# Altium PCB PnP.PcbDoc (part 5 of 5)
Units mm, origin at the board's own origin, x right, y up, seen from the top; angles counter-clockwise.
Board outline 95 x 65 mm, 6 copper layers (Top Layer, L2 - GND, L3 - PWR, L4 - Sig, L5 - GND, Bottom Layer), stack 1.538 mm thick; 358 components, 260 nets, 1269 pads, 686 vias.
Unrouted connection lines stored in the file: 161.
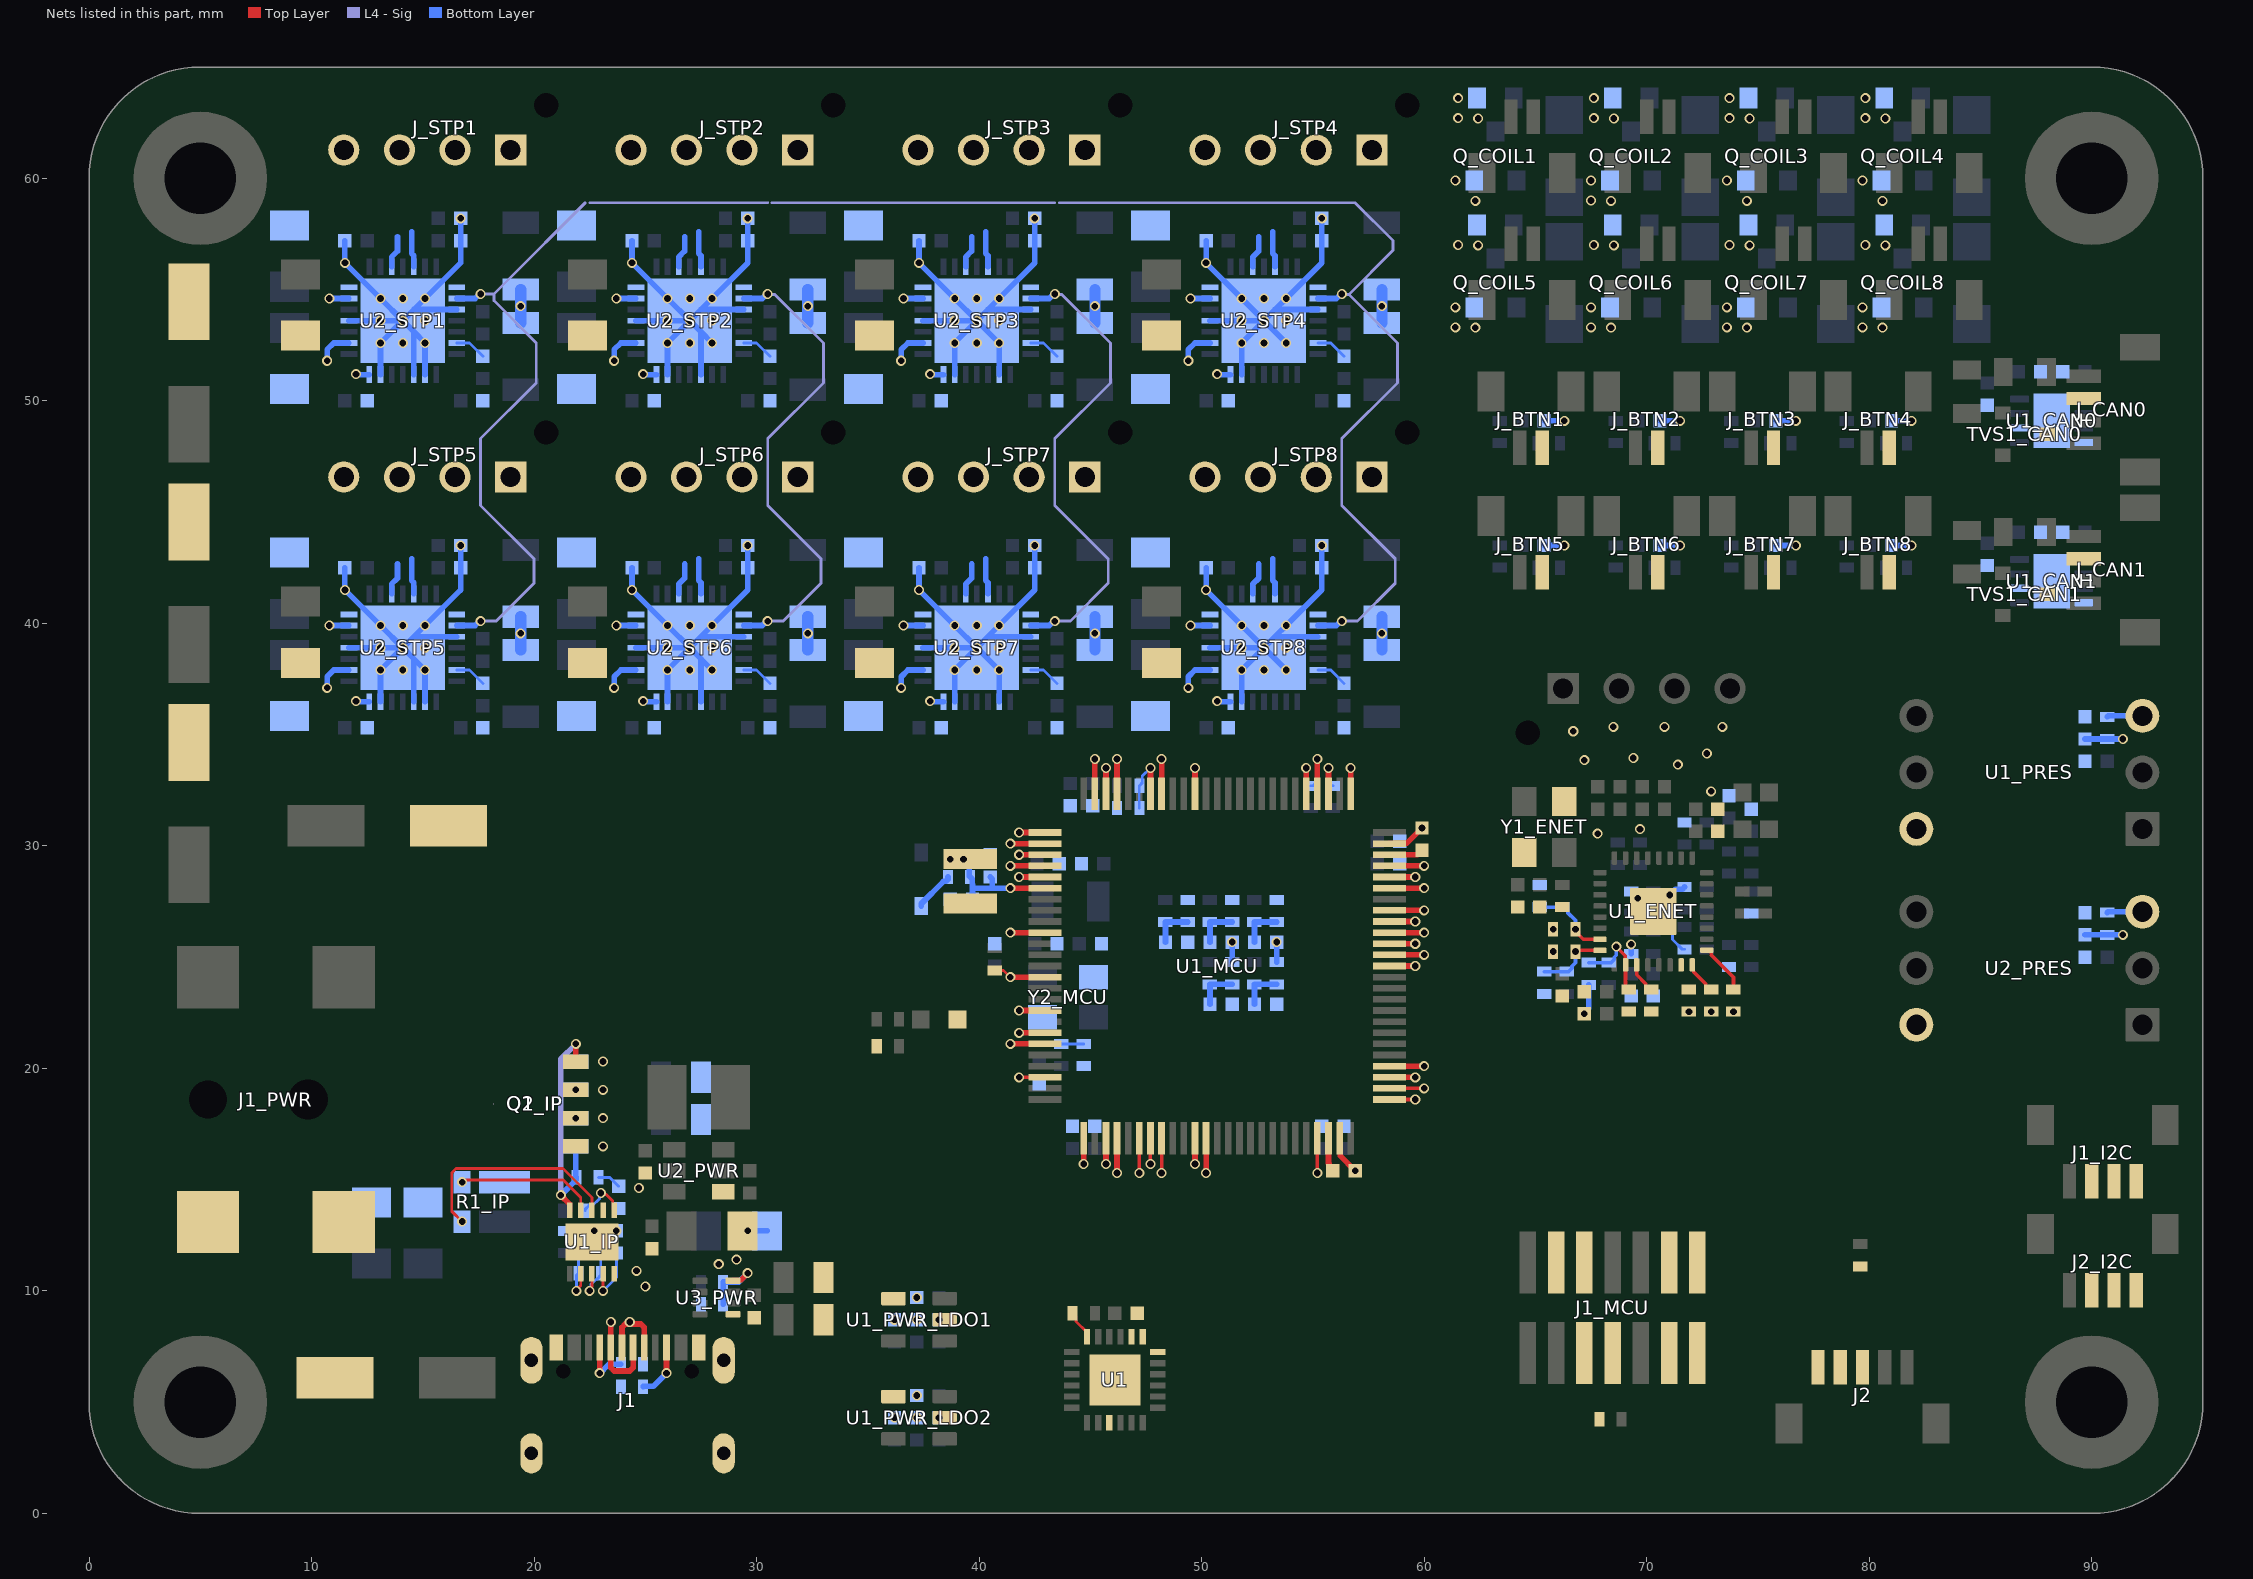
[diagram p8: the nets of this part, all layers, seen from the top]

## Via types
v1: diameter 0.45, hole 0.3, Top Layer to Bottom Layer, tented both sides, 674 vias
v2: diameter 0.55, hole 0.4, Top Layer to Bottom Layer, tented both sides, 12 vias

## Nets (pads, with @x,y where several pads share a name; then routed paths per layer and width w, separated by ;. In a path a pad name is that pad's centre, name@x,y a point inside that pad or via, vN(x,y) a via of type N, cw(c..) or ccw(c..) an arc to the next point about the centre after c; other vN are vias at no path point) (continued)
GND: B1_MCU.2 C1.1 C1_BTN1.1 C1_BTN2.1 C1_BTN3.1 C1_BTN4.1 C1_BTN5.1 C1_BTN6.1 C1_BTN7.1 C1_BTN8.1 C1_CAN0.2 C1_CAN1.2 C1_IP.2 C1_MCU.1 C1_PRES.1 C1_PWR_LDO1.1 C1_PWR_LDO2.1 C1_STP1.1 C1_STP2.1 C1_STP3.1 C1_STP4.1 C1_STP5.1 C1_STP6.1 C1_STP7.1 C1_STP8.1 C2_CAN0.2 C2_CAN1.2 C2_IP.1 C2_MCU.1 C2_PRES.1 C2_PWR_LDO1.1 C2_PWR_LDO2.1 C2_STP1.1 C2_STP2.1 C2_STP3.1 C2_STP4.1 C2_STP5.1 C2_STP6.1 C2_STP7.1 C2_STP8.1 C3_CAN0.1 C3_CAN1.1 C3_ENET.1 C3_IP.1 C3_MCU.1 C3_PRES.1 C3_PWR_LDO1.1 C3_PWR_LDO2.1 C3_STP1.1 C3_STP2.1 C3_STP3.1 C3_STP4.1 C3_STP5.1 C3_STP6.1 C3_STP7.1 C3_STP8.1 C4_ENET.1 C4_IP.1 C4_MCU.1 C4_PRES.1 C4_PWR_LDO1.1 C4_PWR_LDO2.1 C5_ENET.1 C5_IP.1 C5_MCU.1 C5_STP1.1 C5_STP2.1 C5_STP3.1 C5_STP4.1 C5_STP5.1 C5_STP6.1 C5_STP7.1 C5_STP8.1 C6_ENET.1 C6_PWR.1 C6_STP1.1 C6_STP2.1 C6_STP3.1 C6_STP4.1 C6_STP5.1 C6_STP6.1 C6_STP7.1 C6_STP8.1 C7_MCU.1 C7_PWR.1 C8_MCU.1 C8_PWR.1 C8_STP1.1 C8_STP2.1 C8_STP3.1 C8_STP4.1 C8_STP5.1 C8_STP6.1 C8_STP7.1 C8_STP8.1 C9_ENET.1 C9_MCU.1 C9_PWR.2 C9_STP1.1 C9_STP2.1 C9_STP3.1 C9_STP4.1 C9_STP5.1 C9_STP6.1 C9_STP7.1 C9_STP8.1 C10_ENET.1 C10_MCU.1 C10_PWR.1 C10_STP1.1 C10_STP2.1 C10_STP3.1 C10_STP4.1 C10_STP5.1 C10_STP6.1 C10_STP7.1 C10_STP8.1 C11_ENET.1 C11_MCU.1 C11_PWR.1 C12_ENET.1 C12_MCU.1 C12_PWR.2 C13_ENET.1 C13_MCU.1 C13_PWR.2 C14_ENET.1 C14_MCU.1 C14_PWR.2 C15_ENET.1 C15_MCU.1 C15_PWR.2 C16_MCU.1 C16_PWR.2 C17_MCU.1 C17_PWR.2 C18_MCU.1 C18_PWR.2 C19_MCU.1 C19_PWR.2 C20_PWR.2 C21_PWR.1 C22_PWR.1 C23_PWR.1 C_COIL1.1 C_COIL2.1 C_COIL3.1 C_COIL4.1 C_COIL5.1 C_COIL6.1 C_COIL7.1 C_COIL8.1 D2_MCU.1 J1.A1 J1.B1 J1.SH1 J1.SH2 J1.SH3 J1.SH4 J1_I2C.2 J1_MCU.5 J1_MCU.7 J1_PWR.2 J1_PWR.3 J2.5 J2_I2C.2 J_BTN1.2 J_BTN2.2 J_BTN3.2 J_BTN4.2 J_BTN5.2 J_BTN6.2 J_BTN7.2 J_BTN8.2 J_CAN0.2 J_CAN1.2 Q_COIL1.2 Q_COIL2.2 Q_COIL3.2 Q_COIL4.2 Q_COIL5.2 Q_COIL6.2 Q_COIL7.2 Q_COIL8.2 R1_STP1.2 R1_STP2.2 R1_STP3.2 R1_STP4.2 R1_STP5.2 R1_STP6.2 R1_STP7.2 R1_STP8.2 R2_STP1.2 R2_STP2.2 R2_STP3.2 R2_STP4.2 R2_STP5.2 R2_STP6.2 R2_STP7.2 R2_STP8.2 R3.1 R3_PWR.1 R4.1 R4_PWR.1 R6_IP.1 R6_MCU.1 R8_MCU.1 R8_PWR.1 R9_PWR.1 R10_PWR.1 R12_ENET.1 R12_PWR.1 R27_ENET.1 R28_ENET.1 R29_ENET.1 R30_ENET.1 R31_ENET.1 R32_ENET.1 R33_ENET.1 R34_ENET.1 R35_ENET.1 R36_ENET.1 TVS1_CAN0.3 TVS1_CAN1.3 U1.9 U1.18 U1.25 U1_CAN0.2 U1_CAN0.8 U1_CAN0.9 U1_CAN1.2 U1_CAN1.8 U1_CAN1.9 U1_ENET.33 U1_IP.5 U1_IP.11 U1_MCU.10 U1_MCU.19 U1_MCU.26 U1_MCU.49 U1_MCU.74 U1_MCU.99 U1_PRES.6 U1_PWR_LDO1.2 U1_PWR_LDO1.4 U1_PWR_LDO2.2 U1_PWR_LDO2.4 U2_PRES.6 U2_PWR.4 U2_STP1.3 U2_STP1.9 U2_STP1.10 U2_STP1.13 U2_STP1.18 U2_STP1.29 U2_STP2.3 U2_STP2.10 U2_STP2.13 U2_STP2.18 U2_STP2.29 U2_STP3.3 U2_STP3.9 U2_STP3.13 U2_STP3.18 U2_STP3.29 U2_STP4.3 U2_STP4.13 U2_STP4.18 U2_STP4.29 U2_STP5.3 U2_STP5.9 U2_STP5.10 U2_STP5.13 U2_STP5.18 U2_STP5.29 U2_STP6.3 U2_STP6.10 U2_STP6.13 U2_STP6.18 U2_STP6.29 U2_STP7.3 U2_STP7.9 U2_STP7.13 U2_STP7.18 U2_STP7.29 U2_STP8.3 U2_STP8.13 U2_STP8.18 U2_STP8.29 U3_PWR.1 Y1_ENET.2 Y1_ENET.4 Y2_MCU.2 Y2_MCU.4 | length 201.2
  Top Layer w0.254: v1(41.4,26.1) U1_MCU.10@42.962,26.1 ; v1(41.8,21.6) U1_MCU.19@42.962,21.6 ; v1(44.7,15.7) U1_MCU.26@44.7,16.862 ; U1_MCU.99@45.2,32.338 v1(45.2,33.9) ; U1_MCU.49@56.2,16.862 56.223,16.839 56.223,16.077 v1(56.9,15.4) ; U1_MCU.74@58.438,30.1 58.461,30.123 59.223,30.123 v1(59.9,30.8)
  Bottom Layer w0.127: v1(71.044,27.794) 71.044,27.706 71.154,27.596 71.154,25.796 71.6,25.35 R32_ENET.1@71.7,25.35
  Bottom Layer w0.254: C1_STP5.1@11.5,42.5 v1(11.5,41.5) v1(13.1,39.9) v1(14.1,38.9) ; C1_STP1.1@11.5,57.2 v1(11.5,56.2) v1(13.1,54.6) v1(14.1,53.6) ; U2_STP5.18@11.677,38.9 v1(13.1,38.9) v1(14.1,38.9) ; U2_STP1.18@11.677,53.6 v1(13.1,53.6) v1(14.1,53.6) ; U2_STP5.13@13.1,36.477 v1(13.1,37.9) v1(14.1,38.9) ; U2_STP1.13@13.1,51.177 v1(13.1,52.6) v1(14.1,53.6) ; U2_STP5.10@14.6,36.477 U2_STP5.29@14.6,38.4 ; U2_STP1.10@14.6,51.177 U2_STP1.29@14.6,53.1 ; U2_STP5.9@15.1,36.477 v1(15.1,37.9) U2_STP5.29@14.6,38.4 ; U2_STP1.9@15.1,51.177 v1(15.1,52.6) U2_STP1.29@14.6,53.1 ; U2_STP5.3@16.523,39.4 U2_STP5.29@14.6,39.4 ; U2_STP1.3@16.523,54.1 U2_STP1.29@14.6,54.1 ; v1(16.7,43.5) C2_STP5.1@16.7,42.5 16.7,41.5 v1(15.1,39.9) U2_STP5.29@14.6,39.4 ; v1(16.7,58.2) C2_STP1.1@16.7,57.2 16.7,56.2 v1(15.1,54.6) U2_STP1.29@14.6,54.1 ; C1_STP6.1@24.4,42.5 v1(24.4,41.5) v1(26,39.9) v1(27,38.9) ; C1_STP2.1@24.4,57.2 v1(24.4,56.2) v1(26,54.6) v1(27,53.6) ; U2_STP6.18@24.577,38.9 v1(26,38.9) v1(27,38.9) ; U2_STP2.18@24.577,53.6 v1(26,53.6) v1(27,53.6) ; U2_STP6.13@26,36.477 v1(26,37.9) v1(27,38.9) ; U2_STP2.13@26,51.177 v1(26,52.6) v1(27,53.6) ; U2_STP6.10@27.5,36.477 U2_STP6.29@27.5,38.4 ; U2_STP2.10@27.5,51.177 U2_STP2.29@27.5,53.1 ; v1(28,37.9) U2_STP6.29@27.5,38.4 ; v1(28,52.6) U2_STP2.29@27.5,53.1 ; U2_STP6.3@29.423,39.4 U2_STP6.29@27.5,39.4 ; U2_STP2.3@29.423,54.1 U2_STP2.29@27.5,54.1 ; v1(29.6,12.7) C11_PWR.1@30.475,12.7 ; v1(29.6,43.5) C2_STP6.1@29.6,42.5 29.6,41.5 v1(28,39.9) U2_STP6.29@27.5,39.4 ; v1(29.6,58.2) C2_STP2.1@29.6,57.2 29.6,56.2 v1(28,54.6) U2_STP2.29@27.5,54.1 ; C1_STP7.1@37.3,42.5 v1(37.3,41.5) v1(38.9,39.9) v1(39.9,38.9) ; C1_STP3.1@37.3,57.2 v1(37.3,56.2) v1(38.9,54.6) v1(39.9,53.6) ; U2_STP7.18@37.477,38.9 v1(38.9,38.9) v1(39.9,38.9) ; U2_STP3.18@37.477,53.6 v1(38.9,53.6) v1(39.9,53.6) ; U2_STP7.13@38.9,36.477 v1(38.9,37.9) v1(39.9,38.9) ; U2_STP3.13@38.9,51.177 v1(38.9,52.6) v1(39.9,53.6) ; U2_STP7.9@40.9,36.477 v1(40.9,37.9) v1(39.9,38.9) ; U2_STP3.9@40.9,51.177 v1(40.9,52.6) v1(39.9,53.6) ; U2_STP7.3@42.323,39.4 U2_STP7.29@40.4,39.4 ; U2_STP3.3@42.323,54.1 U2_STP3.29@40.4,54.1 ; v1(42.5,43.5) C2_STP7.1@42.5,42.5 42.5,41.5 v1(40.9,39.9) U2_STP7.29@40.4,39.4 ; v1(42.5,58.2) C2_STP3.1@42.5,57.2 42.5,56.2 v1(40.9,54.6) U2_STP3.29@40.4,54.1 ; C1_STP8.1@50.2,42.5 v1(50.2,41.5) v1(51.8,39.9) v1(52.8,38.9) ; C1_STP4.1@50.2,57.2 v1(50.2,56.2) v1(51.8,54.6) v1(52.8,53.6) ; U2_STP8.18@50.377,38.9 v1(51.8,38.9) v1(52.8,38.9) ; U2_STP4.18@50.377,53.6 v1(51.8,53.6) v1(52.8,53.6) ; R10_PWR.1@51.375,24.775 v1(51.375,25.675) ; U2_STP8.13@51.8,36.477 v1(51.8,37.9) v1(52.8,38.9) ; U2_STP4.13@51.8,51.177 v1(51.8,52.6) v1(52.8,53.6) ; R9_PWR.1@53.375,24.775 v1(53.375,25.675) ; v1(53.8,37.9) v1(52.8,38.9) ; v1(53.8,52.6) v1(52.8,53.6) ; U2_STP8.3@55.223,39.4 U2_STP8.29@53.3,39.4 ; U2_STP4.3@55.223,54.1 U2_STP4.29@53.3,54.1 ; v1(55.4,43.5) C2_STP8.1@55.4,42.5 55.4,41.5 v1(53.8,39.9) U2_STP8.29@53.3,39.4 ; v1(55.4,58.2) C2_STP4.1@55.4,57.2 55.4,56.2 v1(53.8,54.6) U2_STP4.29@53.3,54.1 ; C1_BTN5.1@65.4,43.5 v1(66.3,43.5) ; C1_BTN1.1@65.4,49.1 v1(66.3,49.1) ; v1(67.2,22.45) 67.2,22.497 67.4,22.697 R31_ENET.1@67.4,23.75 ; R28_ENET.1@69.3,25.15 v1(69.3,25.573) ; C1_BTN6.1@70.6,43.5 v1(71.5,43.5) ; C1_BTN2.1@70.6,49.1 v1(71.5,49.1) ; v1(71.044,27.794) 71.302,28.052 71.602,28.052 R30_ENET.1@71.7,28.15 ; C1_BTN7.1@75.8,43.5 v1(76.7,43.5) ; C1_BTN3.1@75.8,49.1 v1(76.7,49.1) ; C1_BTN8.1@81,43.5 v1(81.9,43.5) ; C1_BTN4.1@81,49.1 v1(81.9,49.1) ; v1(14.1,38.9) U2_STP5.29@14.6,39.4 ; v1(14.1,38.9) U2_STP5.29@14.6,38.4 ; v1(14.1,53.6) U2_STP1.29@14.6,54.1 ; v1(14.1,53.6) U2_STP1.29@14.6,53.1 ; v1(27,38.9) U2_STP6.29@27.5,39.4 ; v1(27,38.9) U2_STP6.29@27.5,38.4 ; v1(27,53.6) U2_STP2.29@27.5,54.1 ; v1(27,53.6) U2_STP2.29@27.5,53.1 ; v1(39.9,38.9) U2_STP7.29@40.4,39.4 ; v1(39.9,53.6) U2_STP3.29@40.4,54.1 ; v1(52.8,38.9) U2_STP8.29@53.3,39.4 ; v1(52.8,53.6) U2_STP4.29@53.3,54.1
  Bottom Layer w0.5: R1_STP5.2@19.4,38.8 v1(19.4,39.55) R2_STP5.2@19.4,40.3 ; R1_STP1.2@19.4,53.5 v1(19.4,54.25) R2_STP1.2@19.4,55 ; R1_STP6.2@32.3,38.8 v1(32.3,39.55) R2_STP6.2@32.3,40.3 ; R1_STP2.2@32.3,53.5 v1(32.3,54.25) R2_STP2.2@32.3,55 ; R1_STP7.2@45.2,38.8 v1(45.2,39.55) R2_STP7.2@45.2,40.3 ; R1_STP3.2@45.2,53.5 v1(45.2,54.25) R2_STP3.2@45.2,55 ; R1_STP8.2@58.1,38.8 v1(58.1,39.55) R2_STP8.2@58.1,40.3 ; R1_STP4.2@58.1,53.5 v1(58.1,54.25) R2_STP4.2@58.1,55
  other v1: 36.2,4.3 37.2,4.3 38.2,4.3 37.2,5.3 36.2,8.7 37.2,8.7 38.2,8.7 37.2,9.7 25,10.2 24.6,10.9 28.3,11.2 29.1,11.4 22.7,12.7 23.7,12.7 24.709,14.627 69.6,27.65 67.8,30.55 69.7,30.75 72.9,32.45 71.4,33.65 67.2,33.85 69.4,33.95 72.7,34.15 66.7,35.15 68.5,35.35 70.8,35.35 73.4,35.35 14.1,37.9 27,37.9 39.9,37.9 52.8,37.9 15.1,38.9 28,38.9 40.9,38.9 53.8,38.9 14.1,39.9 27,39.9 39.9,39.9 52.8,39.9 14.1,52.6 27,52.6 39.9,52.6 52.8,52.6 62.3,53.286 68.4,53.286 74.5,53.286 80.6,53.286 61.4,53.3 67.5,53.3 73.6,53.3 79.7,53.3 15.1,53.6 28,53.6 40.9,53.6 53.8,53.6 61.4,54.2 67.5,54.2 73.6,54.2 79.7,54.2 14.1,54.6 27,54.6 39.9,54.6 52.8,54.6 62.425,56.986 68.525,56.986 74.625,56.986 80.725,56.986 61.525,57 67.625,57 73.725,57 79.825,57 62.3,58.986 67.5,59 68.4,58.985 74.5,58.986 80.6,58.986 61.4,59.9 67.5,59.9 73.6,59.9 79.7,59.9 61.525,62.7 62.425,62.686 67.625,62.7 68.525,62.686 73.725,62.7 74.625,62.686 79.825,62.7 80.725,62.686 61.525,63.6 67.625,63.6 73.725,63.6 79.825,63.6
I2C_CONN.SCL: J1_I2C.3 J2_I2C.3 R11_MCU.1 U1_MCU.79 | length 2.9
  Top Layer w0.254: U1_MCU.79@55.2,32.338 v1(55.2,33.9)
  Bottom Layer w0.127: 54.9,32.7 55,32.7 55.162,32.861 55.162,32.961 55.2,33 v1(55.2,33.9)
I2C_CONN.SDA: J1_I2C.4 J2_I2C.4 R9_MCU.1 U1_MCU.78 | length 2.1
  Top Layer w0.254: U1_MCU.78@55.7,32.338 v1(55.7,33.5)
  Bottom Layer w0.127: v1(55.7,33.5) 55.7,32.862 55.862,32.7 55.9,32.7
I2C_MAIN.SCL: R3_MCU.1 U1.19 U1_MCU.67 | length 1.2
  Top Layer w0.254: U1_MCU.67@58.438,26.6 v1(59.6,26.6)
I2C_MAIN.SDA: R2_MCU.1 U1.20 U1_MCU.66 | length 1.6
  Top Layer w0.254: U1_MCU.66@58.438,26.1 v1(60,26.1)
IP_FLT_L: U1_IP.7
IP_GATE: Q1_IP.4 Q2_IP.4 R5_IP.2 U1_IP.10 | length 11.2
  Top Layer w0.254: v1(21.2,14.3) 21.6,13.9 U1_IP.10@21.6,13.625 ; Q1_IP.4@21.88,20.305 v1(21.88,21.1)
  L4 - Sig w0.254: v1(21.2,14.3) 21.2,20.42 v1(21.88,21.1)
  Bottom Layer w0.254: v1(21.2,14.3) 21.9,15 R5_IP.2@21.9,15.1 21.88,15.12 Q2_IP.4@21.88,16.495
IP_GATE_R: C5_IP.2 R5_IP.1 | length 1.1
  Bottom Layer w0.127: R5_IP.1@22.9,15.1 23.4,15.1 C5_IP.2@23.8,14.7
IP_ISNS_N: R1_IP.S2 U1_IP.8 | length 9.9
  Top Layer w0.127: v1(16.766,13.115) 16.3,13.581 16.3,15.3 16.5,15.5 21.3,15.5 22.6,14.2 U1_IP.8@22.6,13.625
IP_ISNS_P: R1_IP.S1 U1_IP.9 | length 6.3
  Top Layer w0.127: v1(16.766,14.885) 16.853,14.885 16.953,14.985 21.315,14.985 22.1,14.2 U1_IP.9@22.1,13.625
IP_OV: R4_IP.1 R6_IP.2 U1_IP.3 | length 2.9
  Top Layer w0.127: v1(22.5,10) 22.5,10.087 22.6,10.187 U1_IP.3@22.6,10.775
  Bottom Layer w0.127: v1(22.5,10) 22.549,10.049 22.549,10.285 22.802,10.538 22.838,10.538 23,10.7 23,11.5 22.8,11.7 R6_IP.2@22.7,11.7
IP_RETRY: C4_IP.2 U1_IP.4 | length 2.7
  Top Layer w0.127: v1(23.1,10) U1_IP.4@23.1,10.775
  Bottom Layer w0.127: v1(23.1,10) 23.7,10.6 C4_IP.2@23.7,11.7
IP_SHDN: R3_IP.1 U1_IP.6 | length 2.3
  Top Layer w0.127: v1(23,14.4) 23.062,14.338 23.241,14.338 23.538,14.041 23.538,13.687 U1_IP.6@23.6,13.625
  Bottom Layer w0.127: R3_IP.1@22.3,13.6 22.3,13.671 22.461,13.833 22.633,13.833 22.938,14.138 22.938,14.338 v1(23,14.4)
IP_SOURCE: Q1_IP.1 Q1_IP.2 Q1_IP.3 Q2_IP.1 Q2_IP.2 Q2_IP.3
  other v1: 23.1,16.495 21.88,17.765 23.1,17.765 21.88,19.035 23.1,19.035 23.1,20.305
IP_UV: R2_IP.1 R4_IP.2 U1_IP.2 | length 3.8
  Top Layer w0.127: v1(21.9,10) 21.9,10.034 22.1,10.234 U1_IP.2@22.1,10.775
  Bottom Layer w0.127: R2_IP.1@21.5,12.7 22,12.2 R4_IP.2@22,10.8 21.9,10.7 v1(21.9,10)
IP_VOUT_R: Q2_IP.5 R1_IP.1
MCU_BOOT0: R5_MCU.1 R6_MCU.2 U1_MCU.94 | length 3.2
  Top Layer w0.254: U1_MCU.94@47.7,32.338 v1(47.7,33.5)
  Bottom Layer w0.127: R6_MCU.2@47.2,31.7 R5_MCU.1@47.2,32.7 47.333,32.833 47.333,33.133 v1(47.7,33.5)
MCU_RST_L: J1_MCU.12 R4_MCU.1 U1_MCU.14 | length 2.4
  Top Layer w0.127: R4_MCU.1@40.7,24.4 41.1,24.4 v1(41.4,24.1)
  Top Layer w0.254: v1(41.4,24.1) U1_MCU.14@42.962,24.1
MCU_VCAP: C7_MCU.2 C8_MCU.2 U1_MCU.48 U1_MCU.73 | length 4.3
  Top Layer w0.254: U1_MCU.48@55.7,16.862 55.7,15.743 55.727,15.716 55.727,15.573 C8_MCU.2@55.9,15.4 ; C7_MCU.2@59.6,29.6 U1_MCU.73@58.438,29.6 59.7,29.6 C7_MCU.2@59.9,29.8
OUT_1N_STP1: J_STP1.4 U2_STP1.21
OUT_1N_STP2: J_STP2.4 U2_STP2.21
OUT_1N_STP3: J_STP3.4 U2_STP3.21
OUT_1N_STP4: J_STP4.4 U2_STP4.21
OUT_1N_STP5: J_STP5.4 U2_STP5.21
OUT_1N_STP6: J_STP6.4 U2_STP6.21
OUT_1N_STP7: J_STP7.4 U2_STP7.21
OUT_1N_STP8: J_STP8.4 U2_STP8.21
OUT_1P_STP1: J_STP1.3 U2_STP1.24 | length 1.5
  Bottom Layer w0.254: U2_STP1.24@13.6,56.024 13.6,56.46 13.865,56.724 13.865,57.365
OUT_1P_STP2: J_STP2.3 U2_STP2.24 | length 1.5
  Bottom Layer w0.254: U2_STP2.24@26.5,56.023 26.5,56.46 26.765,56.724 26.765,57.365
OUT_1P_STP3: J_STP3.3 U2_STP3.24 | length 1.5
  Bottom Layer w0.254: U2_STP3.24@39.4,56.023 39.4,56.46 39.665,56.724 39.665,57.365
OUT_1P_STP4: J_STP4.3 U2_STP4.24 | length 1.5
  Bottom Layer w0.254: U2_STP4.24@52.3,56.023 52.3,56.46 52.565,56.724 52.565,57.365
OUT_1P_STP5: J_STP5.3 U2_STP5.24 | length 1.5
  Bottom Layer w0.254: U2_STP5.24@13.6,41.324 13.6,41.76 13.865,42.024 13.865,42.665
OUT_1P_STP6: J_STP6.3 U2_STP6.24 | length 1.5
  Bottom Layer w0.254: U2_STP6.24@26.5,41.323 26.5,41.76 26.765,42.024 26.765,42.665
OUT_1P_STP7: J_STP7.3 U2_STP7.24 | length 1.5
  Bottom Layer w0.254: U2_STP7.24@39.4,41.323 39.4,41.76 39.665,42.024 39.665,42.665
OUT_1P_STP8: J_STP8.3 U2_STP8.24 | length 1.5
  Bottom Layer w0.254: U2_STP8.24@52.3,41.323 52.3,41.76 52.565,42.024 52.565,42.665
OUT_2N_STP1: J_STP1.1 U2_STP1.1
OUT_2N_STP2: J_STP2.1 U2_STP2.1
OUT_2N_STP3: J_STP3.1 U2_STP3.1
OUT_2N_STP4: J_STP4.1 U2_STP4.1
OUT_2N_STP5: J_STP5.1 U2_STP5.1
OUT_2N_STP6: J_STP6.1 U2_STP6.1
OUT_2N_STP7: J_STP7.1 U2_STP7.1
OUT_2N_STP8: J_STP8.1 U2_STP8.1
OUT_2P_STP1: J_STP1.2 U2_STP1.26 | length 1.6
  Bottom Layer w0.254: 14.5,57.6 14.5,56.623 14.6,56.523 U2_STP1.26@14.6,56.023
OUT_2P_STP2: J_STP2.2 U2_STP2.26 | length 1.6
  Bottom Layer w0.254: 27.4,57.6 27.4,56.623 27.5,56.523 U2_STP2.26@27.5,56.023
OUT_2P_STP3: J_STP3.2 U2_STP3.26 | length 1.6
  Bottom Layer w0.254: 40.3,57.6 40.3,56.623 40.4,56.523 U2_STP3.26@40.4,56.024
OUT_2P_STP4: J_STP4.2 U2_STP4.26 | length 1.6
  Bottom Layer w0.254: 53.2,57.6 53.2,56.623 53.3,56.523 U2_STP4.26@53.3,56.023
OUT_2P_STP5: J_STP5.2 U2_STP5.26 | length 1.6
  Bottom Layer w0.254: 14.5,42.9 14.5,41.923 14.6,41.823 U2_STP5.26@14.6,41.323
OUT_2P_STP6: J_STP6.2 U2_STP6.26 | length 1.6
  Bottom Layer w0.254: 27.4,42.9 27.4,41.923 27.5,41.823 U2_STP6.26@27.5,41.323
OUT_2P_STP7: J_STP7.2 U2_STP7.26 | length 1.6
  Bottom Layer w0.254: 40.3,42.9 40.3,41.923 40.4,41.823 U2_STP7.26@40.4,41.324
OUT_2P_STP8: J_STP8.2 U2_STP8.26 | length 1.6
  Bottom Layer w0.254: 53.2,42.9 53.2,41.923 53.3,41.823 U2_STP8.26@53.3,41.323
PLC_IO_EXP_RST_L: R1.1 U1.24 | length 1.3
  Top Layer w0.127: R1.1@44.2,9 44.362,8.838 44.362,8.628 44.85,8.14 U1.24@44.85,7.93
PMUX_PR: R11_PWR.1 R12_PWR.2 U3_PWR.4 | length 3.1
  Top Layer w0.254: U3_PWR.4@28.94,10.45 28.963,10.473 29.273,10.473 v1(29.6,10.8)
  Bottom Layer w0.254: R12_PWR.2@28.5,9.4 R11_PWR.1@28.5,10.4 29.2,10.4 v1(29.6,10.8)
PRES1_OUT_R: R1_PRES.2 U1_PRES.3 | length 1.6
  Bottom Layer w0.254: R1_PRES.2@90.7,35.8 90.74,35.84 U1_PRES.3@92.28,35.84
PRES2_OUT_R: R2_PRES.2 U2_PRES.3 | length 1.6
  Bottom Layer w0.254: R2_PRES.2@90.7,27 90.74,27.04 U2_PRES.3@92.28,27.04
PRESS1: C2_PRES.2 R1_PRES.1 U1_MCU.28 | length 2.9
  Top Layer w0.254: v1(45.7,15.7) U1_MCU.28@45.7,16.862
  Bottom Layer w0.254: C2_PRES.2@89.7,34.8 R1_PRES.1@90.7,34.8 v1(91.4,34.8)
PRESS2: C4_PRES.2 R2_PRES.1 U1_MCU.29 | length 3.3
  Top Layer w0.254: v1(46.2,15.3) U1_MCU.29@46.2,16.862
  Bottom Layer w0.254: C4_PRES.2@89.7,26 R2_PRES.1@90.7,26 v1(91.4,26)
PRGMR_DETECT: J1_MCU.11 R13_MCU.1
RMII_MAC_TO_PHY_D0: R3_ENET.2 U1_MCU.51 | length 1.2
  Top Layer w0.161: U1_MCU.51@58.438,18.6 v1(59.6,18.6)
  other v1: 72.9,22.55
RMII_MAC_TO_PHY_D0_R: R3_ENET.1 U1_ENET.24 | length 1.5
  Top Layer w0.161: U1_ENET.24@72.05,24.65 72.095,24.605 72.095,24.355 72.655,23.795 72.655,23.695 72.8,23.55 R3_ENET.1@72.9,23.55
RMII_MAC_TO_PHY_D1: R4_ENET.2 U1_MCU.52 | length 1.6
  Top Layer w0.161: U1_MCU.52@58.438,19.1 v1(60,19.1)
  other v1: 73.9,22.55
RMII_MAC_TO_PHY_D1_R: R4_ENET.1 U1_ENET.25 | length 2.3
  Top Layer w0.161: U1_ENET.25@72.7,25.3 72.863,25.3 72.908,25.255 72.908,25.092 73.9,24.1 R4_ENET.1@73.9,23.55
RMII_MAC_TO_PHY_EN: R2_ENET.2 U1_MCU.47 | length 1.6
  Top Layer w0.161: v1(55.2,15.3) U1_MCU.47@55.2,16.862
  other v1: 71.9,22.55
RMII_MAC_TO_PHY_EN_R: R2_ENET.1 U1_ENET.23
RMII_PHY_TO_MAC_CLK: R7_ENET.2 U1_MCU.23 | length 1.2
  Top Layer w0.161: v1(41.8,19.6) U1_MCU.23@42.962,19.6
RMII_PHY_TO_MAC_CLK_R: R7_ENET.1 U1_ENET.19 | length 1.4
  Top Layer w0.161: U1_ENET.19@69.55,24.65 69.55,24.2 69.955,23.795 69.955,23.695 70.1,23.55 R7_ENET.1@70.2,23.55
RMII_PHY_TO_MAC_D0: R9_ENET.2 U1_MCU.32 | length 1.2
  Top Layer w0.161: v1(47.7,15.7) U1_MCU.32@47.7,16.862
  other v1: 65.8,25.25
RMII_PHY_TO_MAC_D0_R: R9_ENET.1 R25_ENET.1 R35_ENET.2 U1_ENET.16 | length 3.2
  Top Layer w0.161: v1(66.8,25.25) 66.85,25.3 U1_ENET.16@67.9,25.3
  Bottom Layer w0.161: R35_ENET.2@65.4,24.35 R25_ENET.1@66.4,24.35 66.5,24.35 66.645,24.495 66.645,24.595 66.8,24.75 v1(66.8,25.25)
RMII_PHY_TO_MAC_D1: R10_ENET.2 U1_MCU.33 | length 1.6
  Top Layer w0.161: v1(48.2,15.3) U1_MCU.33@48.2,16.862
  other v1: 65.8,26.25
RMII_PHY_TO_MAC_D1_R: R10_ENET.1 R19_ENET.1 R29_ENET.2 U1_ENET.15 | length 3.7
  Top Layer w0.161: v1(66.8,26.25) 66.945,26.105 66.945,26 67.144,25.8 U1_ENET.15@67.9,25.8
  Bottom Layer w0.161: R29_ENET.2@65.2,27.25 R19_ENET.1@66.2,27.25 66.3,27.25 66.445,27.105 66.445,27.005 66.8,26.65 v1(66.8,26.25)
RMII_PHY_TO_MAC_DV: R6_ENET.2 U1_MCU.31 | length 1.6
  Top Layer w0.161: v1(47.2,15.3) U1_MCU.31@47.2,16.862
RMII_PHY_TO_MAC_DV_R: R6_ENET.1 R21_ENET.1 R31_ENET.2 U1_ENET.18 | length 4
  Top Layer w0.161: v1(68.635,25.468) 69.044,25.059 69.044,24.656 U1_ENET.18@69.05,24.65 69.05,23.695 69.195,23.55 R6_ENET.1@69.2,23.55
  Bottom Layer w0.161: R31_ENET.2@67.4,24.75 68.4,24.75 68.545,24.895 68.545,24.995 68.635,25.085 v1(68.635,25.468)
SPARE: U1_MCU.65 | length 1.2
  Top Layer w0.254: U1_MCU.65@58.438,25.6 v1(59.6,25.6)
STBY_STP1: U2_STP1.20 | length 0.9
  Bottom Layer w0.254: v1(10.8,54.6) U2_STP1.20@11.677,54.6
STBY_STP2: U2_STP2.20 | length 0.9
  Bottom Layer w0.254: v1(23.7,54.6) U2_STP2.20@24.577,54.6
STBY_STP3: U2_STP3.20 | length 0.9
  Bottom Layer w0.254: v1(36.6,54.6) U2_STP3.20@37.477,54.6
STBY_STP4: U2_STP4.20 | length 0.9
  Bottom Layer w0.254: v1(49.5,54.6) U2_STP4.20@50.377,54.6
STBY_STP5: U2_STP5.20 | length 0.9
  Bottom Layer w0.254: v1(10.8,39.9) U2_STP5.20@11.677,39.9
STBY_STP6: U2_STP6.20 | length 0.9
  Bottom Layer w0.254: v1(23.7,39.9) U2_STP6.20@24.577,39.9
STBY_STP7: U2_STP7.20 | length 0.9
  Bottom Layer w0.254: v1(36.6,39.9) U2_STP7.20@37.477,39.9
STBY_STP8: U2_STP8.20 | length 0.9
  Bottom Layer w0.254: v1(49.5,39.9) U2_STP8.20@50.377,39.9
STEP1: U1_MCU.97 U2_STP1.16 | length 3.2
  Top Layer w0.254: U1_MCU.97@46.2,32.338 v1(46.2,33.9)
  Bottom Layer w0.254: v1(10.7,51.8) 10.7,52.3 11,52.6 U2_STP1.16@11.677,52.6
STEP2: U1_MCU.98 U2_STP2.16 | length 2.8
  Top Layer w0.254: U1_MCU.98@45.7,32.338 v1(45.7,33.5)
  Bottom Layer w0.254: v1(23.6,51.8) 23.6,52.3 23.9,52.6 U2_STP2.16@24.577,52.6
STEP3: U1_MCU.1 U2_STP3.16 | length 2.8
  Top Layer w0.254: v1(41.8,30.6) U1_MCU.1@42.962,30.6
  Bottom Layer w0.254: v1(36.5,51.8) 36.5,52.3 36.8,52.6 U2_STP3.16@37.477,52.6
STEP4: U1_MCU.2 U2_STP4.16 | length 3.2
  Top Layer w0.254: v1(41.4,30.1) U1_MCU.2@42.962,30.1
  Bottom Layer w0.254: v1(49.4,51.8) 49.4,52.3 49.7,52.6 U2_STP4.16@50.377,52.6
STEP5: U1_MCU.3 U2_STP5.16 | length 2.8
  Top Layer w0.254: v1(41.8,29.6) U1_MCU.3@42.962,29.6
  Bottom Layer w0.254: v1(10.7,37.1) 10.7,37.6 11,37.9 U2_STP5.16@11.677,37.9
STEP6: U1_MCU.4 U2_STP6.16 | length 3.2
  Top Layer w0.254: v1(41.4,29.1) U1_MCU.4@42.962,29.1
  Bottom Layer w0.254: v1(23.6,37.1) 23.6,37.6 23.9,37.9 U2_STP6.16@24.577,37.9
STEP7: U1_MCU.5 U2_STP7.16 | length 2.8
  Top Layer w0.254: v1(41.8,28.6) U1_MCU.5@42.962,28.6
  Bottom Layer w0.254: v1(36.5,37.1) 36.5,37.6 36.8,37.9 U2_STP7.16@37.477,37.9
STEP8: U1_MCU.37 U2_STP8.16 | length 3.2
  Top Layer w0.254: v1(50.2,15.3) U1_MCU.37@50.2,16.862
  Bottom Layer w0.254: v1(49.4,37.1) 49.4,37.6 49.7,37.9 U2_STP8.16@50.377,37.9
STEPPERS_EN: U1_MCU.36 U2_STP1.2 U2_STP2.2 U2_STP3.2 U2_STP4.2 U2_STP5.2 U2_STP6.2 U2_STP7.2 U2_STP8.2 | length 133.4
  Top Layer w0.254: v1(49.7,15.7) U1_MCU.36@49.7,16.862
  L4 - Sig w0.127: v1(17.6,40.1) 18.3,40.1 20,41.8 20,42.9 17.6,45.3 17.6,48.3 20.1,50.8 20.1,52.6 18.2,54.5 18.2,54.8 ; v1(17.6,54.8) 18.2,54.8 ; 22.3,58.9 18.7,55.3 18.2,54.8 ; 22.5,58.9 30.5,58.9 ; v1(30.5,40.1) 31.2,40.1 32.9,41.8 32.9,42.9 30.5,45.3 30.5,48.3 33,50.8 33,52.6 30.817,54.783 30.517,54.783 v1(30.5,54.8) ; 30.7,58.9 43.4,58.9 ; v1(43.4,40.1) 44.1,40.1 45.8,41.8 45.8,42.9 43.4,45.3 43.4,48.3 45.9,50.8 45.9,52.6 43.717,54.783 43.417,54.783 v1(43.4,54.8) ; 43.6,58.9 56.9,58.9 58.6,57.2 58.6,56.766 56.617,54.783 ; v1(56.3,40.1) 57,40.1 58.7,41.8 58.7,42.9 56.3,45.3 56.3,48.3 58.8,50.8 58.8,52.6 56.617,54.783 ; v1(56.3,54.8) 56.317,54.783 56.617,54.783
  Bottom Layer w0.254: U2_STP5.2@16.523,39.9 17.353,39.9 17.553,40.1 v1(17.6,40.1) ; U2_STP1.2@16.523,54.6 17.353,54.6 17.553,54.8 v1(17.6,54.8) ; U2_STP6.2@29.423,39.9 30.253,39.9 30.453,40.1 v1(30.5,40.1) ; U2_STP2.2@29.423,54.6 30.253,54.6 30.453,54.8 v1(30.5,54.8) ; U2_STP7.2@42.323,39.9 43.153,39.9 43.353,40.1 v1(43.4,40.1) ; U2_STP3.2@42.323,54.6 43.153,54.6 43.353,54.8 v1(43.4,54.8) ; U2_STP8.2@55.223,39.9 56.053,39.9 56.253,40.1 v1(56.3,40.1) ; U2_STP4.2@55.223,54.6 56.053,54.6 56.253,54.8 v1(56.3,54.8)
SWCLK: J1_MCU.6 U1_MCU.76 | length 1.2
  Top Layer w0.254: U1_MCU.76@56.7,32.338 v1(56.7,33.5)
SWDIO: J1_MCU.4 U1_MCU.72 | length 1.6
  Top Layer w0.254: U1_MCU.72@58.438,29.1 v1(60,29.1)
TRIGGER1: J2.3 U1_MCU.93 | length 1.6
  Top Layer w0.254: U1_MCU.93@48.2,32.338 v1(48.2,33.9)
TRIGGER2: J2.4 U1_MCU.17 | length 1.2
  Top Layer w0.254: v1(41.8,22.6) U1_MCU.17@42.962,22.6
UART_6_RX: U1_MCU.64 | length 1.6
  Top Layer w0.254: U1_MCU.64@58.438,25.1 v1(60,25.1)
UART_6_TX: U1_MCU.63 | length 1.2
  Top Layer w0.254: U1_MCU.63@58.438,24.6 v1(59.6,24.6)
UART_BANK1: U1_MCU.80 U2_STP1.14 U2_STP2.14 U2_STP3.14 U2_STP4.14 | length 3.6
  Top Layer w0.254: U1_MCU.80@54.7,32.338 v1(54.7,33.5)
  Bottom Layer w0.254: v1(12,51.2) 12.023,51.177 U2_STP1.14@12.6,51.177 ; v1(24.9,51.2) 24.923,51.177 U2_STP2.14@25.5,51.177 ; v1(37.8,51.2) 37.823,51.177 U2_STP3.14@38.4,51.177 ; v1(50.7,51.2) 50.723,51.177 U2_STP4.14@51.3,51.177
UART_BANK2: U1_MCU.90 U2_STP5.14 U2_STP6.14 U2_STP7.14 U2_STP8.14 | length 3.6
  Top Layer w0.254: U1_MCU.90@49.7,32.338 v1(49.7,33.5)
  Bottom Layer w0.254: v1(12,36.5) 12.023,36.477 U2_STP5.14@12.6,36.477 ; v1(24.9,36.5) 24.923,36.477 U2_STP6.14@25.5,36.477 ; v1(37.8,36.5) 37.823,36.477 U2_STP7.14@38.4,36.477 ; v1(50.7,36.5) 50.723,36.477 U2_STP8.14@51.3,36.477
UART_MCU_TO_PRGMR: J1_MCU.14 U1_MCU.53 | length 1.2
  Top Layer w0.254: U1_MCU.53@58.438,19.6 v1(59.6,19.6)
UART_PRGMR_TO_MCU: J1_MCU.13 U1_MCU.54 | length 1.6
  Top Layer w0.254: U1_MCU.54@58.438,20.1 v1(60,20.1)
USB_CC1: J1.A5 R4.2 | length 2.3
  Top Layer w0.254: v1@22.95,6.303 J1.A5@22.95,7.455
  Bottom Layer w0.254: v1(22.95,6.3) 23.35,6.7 R4.2@23.9,6.7
USB_CC2: J1.B5 R3.2 | length 2.5
  Top Layer w0.254: v1@25.95,6.303 J1.B5@25.95,7.455
  Bottom Layer w0.254: R3.2@24.9,5.7 24.907,5.707 25.357,5.707 v1(25.95,6.3)
USB_DATA_N: J1.A7 J1.B7 U1_MCU.70 | length 5.6
  Top Layer w0.254: v1@23.45,8.607 J1.B7@23.45,7.455 23.45,6.55 23.6,6.4 24.3,6.4 24.35,6.45 24.45,6.55 J1.A7@24.45,7.455 ; U1_MCU.70@58.438,28.1 v1(60,28.1)
  other v1: 23.45,8.6
USB_DATA_P: J1.A6 J1.B6 U1_MCU.71 | length 4.1
  Top Layer w0.254: J1.A6@23.95,7.455 23.95,8.36 24.1,8.51 24.8,8.51 24.95,8.36 J1.B6@24.95,7.455 ; v1@24.29,8.7 v1@24.3,8.7 ; U1_MCU.71@58.438,28.6 v1(59.6,28.6)
  other v1: 24.3,8.6
USB_VBUS: U1_MCU.68 | length 1.6
  Top Layer w0.254: U1_MCU.68@58.438,27.1 v1(60,27.1)
V_COIN: B1_MCU.1 C1_MCU.2 C19_MCU.2 R1_MCU.1 U1_MCU.6 | length 7
  Top Layer w0.127: v1(38.7,29.4) v1(39.3,29.4)
  Top Layer w0.254: v1(41.4,28.1) U1_MCU.6@42.962,28.1
  Bottom Layer w0.254: v1(38.7,29.4) v1(39.3,29.4) 39.56,29.14 39.56,28.64 R1_MCU.1@39.6,28.6 39.698,28.502 39.698,28.255 39.7,28.253 39.7,28.175 ; C1_MCU.2@39.7,27.6 39.7,28.175 ; C19_MCU.2@40.5,28.6 40.588,28.512 40.588,28.1 ; v1(41.4,28.1) 40.588,28.1 ; 39.7,28.175 39.775,28.1 40.588,28.1
V_COIN_R: D1_MCU.1 R1_MCU.2 | length 1.9
  Bottom Layer w0.254: D1_MCU.1@37.4,27.3 37.4,27.4 38.402,28.402 38.502,28.402 38.6,28.5 R1_MCU.2@38.6,28.6
VCP_STP1: C4_STP1.1 U2_STP1.6 | length 1.4
  Bottom Layer w0.127: U2_STP1.6@16.523,52.6 17.1,52.6 C4_STP1.1@17.7,52
VCP_STP2: C4_STP2.1 U2_STP2.6 | length 1.4
  Bottom Layer w0.127: U2_STP2.6@29.423,52.6 30,52.6 C4_STP2.1@30.6,52
VCP_STP3: C4_STP3.1 U2_STP3.6 | length 1.4
  Bottom Layer w0.127: U2_STP3.6@42.323,52.6 42.9,52.6 C4_STP3.1@43.5,52
VCP_STP4: C4_STP4.1 U2_STP4.6 | length 1.4
  Bottom Layer w0.127: U2_STP4.6@55.223,52.6 55.8,52.6 C4_STP4.1@56.4,52
VCP_STP5: C4_STP5.1 U2_STP5.6 | length 1.4
  Bottom Layer w0.127: U2_STP5.6@16.523,37.9 17.1,37.9 C4_STP5.1@17.7,37.3
VCP_STP6: C4_STP6.1 U2_STP6.6 | length 1.4
  Bottom Layer w0.127: U2_STP6.6@29.423,37.9 30,37.9 C4_STP6.1@30.6,37.3
VCP_STP7: C4_STP7.1 U2_STP7.6 | length 1.4
  Bottom Layer w0.127: U2_STP7.6@42.323,37.9 42.9,37.9 C4_STP7.1@43.5,37.3
VCP_STP8: C4_STP8.1 U2_STP8.6 | length 1.4
  Bottom Layer w0.127: U2_STP8.6@55.223,37.9 55.8,37.9 C4_STP8.1@56.4,37.3
VREF_MCU: R7_MCU.1 R8_MCU.2 U1_MCU.20 | length 4.9
  Top Layer w0.254: v1(41.4,21.1) U1_MCU.20@42.962,21.1
  Bottom Layer w0.127: v1(41.4,21.1) R8_MCU.2@44.7,21.1
VSNS_3V3_LOGIC: C16_PWR.1 R7_PWR.1 R10_PWR.2 | length 1.9
  Bottom Layer w0.254: C16_PWR.1@50.375,22.875 R7_PWR.1@50.375,23.775 R10_PWR.2@51.375,23.775
VSNS_3V3_MCU: C15_PWR.1 R6_PWR.1 R9_PWR.2 | length 1.9
  Bottom Layer w0.254: C15_PWR.1@52.375,22.875 52.375,23.55 R6_PWR.1@52.375,23.775 R9_PWR.2@53.375,23.775
VSNS_5V0_LOGIC: C14_PWR.1 R5_PWR.1 R8_PWR.2 | length 1.9
  Bottom Layer w0.254: C14_PWR.1@52.375,25.675 R5_PWR.1@52.375,26.575 R8_PWR.2@53.375,26.575
VSNS_24V_IN: C12_PWR.1 R1_PWR.1 R3_PWR.2 | length 1.9
  Bottom Layer w0.254: C12_PWR.1@48.375,25.675 R1_PWR.1@48.375,26.575 R3_PWR.2@49.375,26.575
VSNS_24V_MAIN: C13_PWR.1 R2_PWR.1 R4_PWR.2 | length 1.9
  Bottom Layer w0.254: C13_PWR.1@50.375,25.675 R2_PWR.1@50.375,26.575 R4_PWR.2@51.375,26.575
pads on no net: J1.A8 J1.B8 J1.MH1 J1.MH2 J1_ENET.H1 J1_I2C.M J1_MCU.1 J1_MCU.2 J1_MCU.8 J1_MCU.9 J1_MCU.10 J1_PWR.M J2.M J2_I2C.M J_BTN1.M J_BTN2.M J_BTN3.M J_BTN4.M J_BTN5.M J_BTN6.M J_BTN7.M J_BTN8.M J_CAN0.M J_CAN1.M J_COIL1.M J_COIL2.M J_COIL3.M J_COIL4.M J_COIL5.M J_COIL6.M J_COIL7.M J_COIL8.M J_STP1.H1 J_STP2.H1 J_STP3.H1 J_STP4.H1 J_STP5.H1 J_STP6.H1 J_STP7.H1 J_STP8.H1 U1.1 U1.2 U1.3 U1.4 U1.5 U1.6 U1.7 U1.8 U1.10 U1.11 U1.12 U1.13 U1.14 U1.15 U1.16 U1.17 U1.22 U1_ENET.20 U1_ENET.21 U1_ENET.22 U1_ENET.26 U1_ENET.27 U1_PRES.1 U1_PRES.4 U1_PRES.5 U2_PRES.1 U2_PRES.4 U2_PRES.5 U2_STP1.7 U2_STP1.12 U2_STP1.17 U2_STP1.25 U2_STP2.7 U2_STP2.12 U2_STP2.17 U2_STP2.25 U2_STP3.7 U2_STP3.12 U2_STP3.17 U2_STP3.25 U2_STP4.7 U2_STP4.12 U2_STP4.17 U2_STP4.25 U2_STP5.7 U2_STP5.12 U2_STP5.17 U2_STP5.25 U2_STP6.7 U2_STP6.12 U2_STP6.17 U2_STP6.25 U2_STP7.7 U2_STP7.12 U2_STP7.17 U2_STP7.25 U2_STP8.7 U2_STP8.12 U2_STP8.17 U2_STP8.25 U3_PWR.8
copper on no net: | length 44
  Bottom Layer w0.127: v1(69.4,20) 70.1,20.7 71.4,20.7 72.1,20 72.2,20 ; 72.2,19 72.1,18.9 v1(72.1,18.3) 73.85,16.55 73.85,15.25
  Bottom Layer w0.161: 65.05,15.25 65.05,16.35 66.24,17.54 67.65,17.54 ; 66.15,15.25 66.15,16.45 66.6,16.9 68,16.9 68.15,17.05 68.15,17.54 ; 67.25,15.25 67.25,16.25 67.5,16.5 68.1,16.5 68.65,17.05 68.65,17.54 ; 67.65,19.06 v1(67.65,19.75) ; 68.15,19.06 v1(68.15,20.25) ; 68.65,19.06 v1(68.65,19.75) ; 69.45,15.25 69.45,16.25 70.15,16.95 70.15,17.54 ; 70.15,19.06 v1(70.15,19.75) ; 70.65,17.54 70.65,17.05 70.9,16.8 71.2,16.8 71.65,16.35 71.65,15.25 ; 70.65,19.06 v1(70.65,20.25) ; 71.15,17.54 71.66,17.54 72.75,16.45 72.75,15.25 ; 71.15,19.06 v1(71.15,19.75)
  Bottom Layer w0.254: v1(67.4,18.3) 69.4,18.3 v1(71.4,18.3) ; v1(68.35,14.103) 68.35,15.25 68.54,15.44 68.54,16.24 69.15,16.85 ; 69.15,17.54 69.15,16.85 ; 69.15,19.06 69.15,19.75 v1(69.4,20) 69.65,19.75 69.65,19.06 ; 69.65,17.54 69.647,17.537 69.647,17.047 69.45,16.85 69.15,16.85

## Polygon pours and split planes (outlines as drawn)
GND on Bottom Layer "NONET_L-01_P-001" (solid, shelved, pour order 134): 0,65 0,0 95,0 95,65
5V0_BUCK on Bottom Layer "PolygonDirect" (solid, shelved, pour order 89): 24.4,10 27.7,10 27.7,20.5 24.4,20.5
IP_VOUT_R on Bottom Layer "PolygonDirect" (solid, shelved, pour order 126): 21.1,14.9 20.5,14.3 16.95,14.3 15.5,15.75 15.5,21.05 21.1,21.05
OUT_2N_STP5 on Bottom Layer "PolygonDirect" (solid, shelved, pour order 125): 16,40.1 18.3,40.1 18.3,43.6 20.2,45.5 20.2,47.1 19.8,47.5 16,47.5
OUT_2N_STP7 on Bottom Layer "PolygonDirect" (solid, shelved, pour order 124): 41.8,40.1 44.1,40.1 44.1,43.6 46,45.5 46,47.1 45.6,47.5 41.8,47.5
OUT_2N_STP2 on Bottom Layer "PolygonDirect" (solid, shelved, pour order 123): 28.9,54.8 31.2,54.8 31.2,58.3 33.1,60.2 33.1,61.8 32.7,62.2 28.9,62.2
OUT_2N_STP3 on Bottom Layer "PolygonDirect" (solid, shelved, pour order 122): 41.8,54.8 44.1,54.8 44.1,58.3 46,60.2 46,61.8 45.6,62.2 41.8,62.2
OUT_2N_STP8 on Bottom Layer "PolygonDirect" (solid, shelved, pour order 121): 54.7,40.1 57,40.1 57,43.6 58.9,45.5 58.9,47.1 58.5,47.5 54.7,47.5
OUT_2N_STP4 on Bottom Layer "PolygonDirect" (solid, shelved, pour order 120): 54.7,54.8 57,54.8 57,58.3 58.9,60.2 58.9,61.8 58.5,62.2 54.7,62.2
OUT_2N_STP6 on Bottom Layer "PolygonDirect" (solid, shelved, pour order 119): 28.9,40.1 31.2,40.1 31.2,43.6 33.1,45.5 33.1,47.1 32.7,47.5 28.9,47.5
OUT_2N_STP1 on Bottom Layer "PolygonDirect" (solid, shelved, pour order 118): 16,54.8 18.3,54.8 18.3,58.3 20.2,60.2 20.2,61.8 19.8,62.2 16,62.2
OUT_2P_STP5 on Bottom Layer "PolygonDirect" (solid, shelved, pour order 105): 14.1,40.8 15.6,40.8 15.6,44 16.4,44 17.5,45.1 17.5,47.5 14.1,47.5
OUT_2P_STP6 on Bottom Layer "PolygonDirect" (solid, shelved, pour order 104): 27,40.8 28.5,40.8 28.5,44 29.3,44 30.4,45.1 30.4,47.5 27,47.5
OUT_2P_STP7 on Bottom Layer "PolygonDirect" (solid, shelved, pour order 103): 39.9,40.8 41.4,40.8 41.4,44 42.2,44 43.3,45.1 43.3,47.5 39.9,47.5
OUT_2P_STP8 on Bottom Layer "PolygonDirect" (solid, shelved, pour order 102): 52.8,40.8 54.3,40.8 54.3,44 55.1,44 56.2,45.1 56.2,47.5 52.8,47.5
OUT_2P_STP4 on Bottom Layer "PolygonDirect" (solid, shelved, pour order 101): 52.8,55.5 54.3,55.5 54.3,58.7 55.1,58.7 56.2,59.8 56.2,62.2 52.8,62.2
OUT_2P_STP3 on Bottom Layer "PolygonDirect" (solid, shelved, pour order 100): 39.9,55.5 41.4,55.5 41.4,58.7 42.2,58.7 43.3,59.8 43.3,62.2 39.9,62.2
OUT_2P_STP2 on Bottom Layer "PolygonDirect" (solid, shelved, pour order 99): 27,55.5 28.5,55.5 28.5,58.7 29.3,58.7 30.4,59.8 30.4,62.2 27,62.2
OUT_2P_STP1 on Bottom Layer "PolygonDirect" (solid, shelved, pour order 98): 14.1,55.5 15.6,55.5 15.6,58.7 16.4,58.7 17.5,59.8 17.5,62.2 14.1,62.2
OUT_1P_STP5 on Bottom Layer "PolygonDirect" (solid, shelved, pour order 97): 12.6,40.8 14.1,40.8 14.1,44.6 15.1,45.6 15.1,47.5 12.6,47.5
OUT_1P_STP6 on Bottom Layer "PolygonDirect" (solid, shelved, pour order 96): 25.5,40.8 27,40.8 27,44.6 28,45.6 28,47.5 25.5,47.5
OUT_1P_STP7 on Bottom Layer "PolygonDirect" (solid, shelved, pour order 95): 38.4,40.8 39.9,40.8 39.9,44.6 40.9,45.6 40.9,47.5 38.4,47.5
OUT_1P_STP8 on Bottom Layer "PolygonDirect" (solid, shelved, pour order 94): 51.3,40.8 52.8,40.8 52.8,44.6 53.8,45.6 53.8,47.5 51.3,47.5
OUT_1P_STP4 on Bottom Layer "PolygonDirect" (solid, shelved, pour order 93): 51.3,55.5 52.8,55.5 52.8,59.3 53.8,60.3 53.8,62.2 51.3,62.2
OUT_1P_STP3 on Bottom Layer "PolygonDirect" (solid, shelved, pour order 92): 38.4,55.5 39.9,55.5 39.9,59.3 40.9,60.3 40.9,62.2 38.4,62.2
OUT_1P_STP2 on Bottom Layer "PolygonDirect" (solid, shelved, pour order 91): 25.5,55.5 27,55.5 27,59.3 28,60.3 28,62.2 25.5,62.2
OUT_1P_STP1 on Bottom Layer "PolygonDirect" (solid, shelved, pour order 90): 12.6,55.5 14.1,55.5 14.1,59.3 15.1,60.3 15.1,62.2 12.6,62.2
24V_MAIN on Bottom Layer "PolygonDirect" (solid, shelved, pour order 88): 11.3,12.5 17.3,12.5 17.3,14.1 20.6,14.1 20.6,9.2 11.3,9.2
IP_SOURCE on Bottom Layer "PolygonDirect" (solid, shelved, pour order 87): 20.75,21.1 20.75,17.25 22.1,15.9 23.2,15.9 24.1,16.8 24.1,20.5 23.5,21.1
24V_MAIN on Bottom Layer "PolygonDirect" (solid, shelved, pour order 86): 46.6,41.7 46.6,37.7 48.8,37.7 48.8,41.7
24V_MAIN on Bottom Layer "PolygonDirect" (solid, shelved, pour order 85): 46.6,56.4 46.6,52.4 48.8,52.4 48.8,56.4
24V_MAIN on Bottom Layer "PolygonDirect" (solid, shelved, pour order 84): 20.8,41.7 20.8,37.7 23,37.7 23,41.7
24V_MAIN on Bottom Layer "PolygonDirect" (solid, shelved, pour order 83): 7.9,41.7 7.9,37.7 10.1,37.7 10.1,41.7
24V_MAIN on Bottom Layer "PolygonDirect" (solid, shelved, pour order 82): 33.7,41.7 33.7,37.7 35.9,37.7 35.9,41.7
24V_MAIN on Bottom Layer "PolygonDirect" (solid, shelved, pour order 81): 20.8,56.4 20.8,52.4 23,52.4 23,56.4
24V_MAIN on Bottom Layer "PolygonDirect" (solid, shelved, pour order 80): 33.7,56.4 33.7,52.4 35.9,52.4 35.9,56.4
24V_MAIN on Bottom Layer "PolygonDirect" (solid, shelved, pour order 79): 7.9,56.4 7.9,52.4 10.1,52.4 10.1,56.4
OUT_1N_STP5 on Bottom Layer "PolygonDirect" (solid, shelved, pour order 78): 11.3,40.1 12.6,40.1 12.6,47.5 11,47.5 10.1,46.6 10.1,41.3
OUT_1N_STP6 on Bottom Layer "PolygonDirect" (solid, shelved, pour order 77): 24.2,40.1 25.5,40.1 25.5,47.5 23.9,47.5 23,46.6 23,41.3
OUT_1N_STP7 on Bottom Layer "PolygonDirect" (solid, shelved, pour order 76): 37.1,40.1 38.4,40.1 38.4,47.5 36.8,47.5 35.9,46.6 35.9,41.3
OUT_1N_STP8 on Bottom Layer "PolygonDirect" (solid, shelved, pour order 75): 50,40.1 51.3,40.1 51.3,47.5 49.7,47.5 48.8,46.6 48.8,41.3
OUT_1N_STP4 on Bottom Layer "PolygonDirect" (solid, shelved, pour order 74): 50,54.8 51.3,54.8 51.3,62.2 49.7,62.2 48.8,61.3 48.8,56
OUT_1N_STP3 on Bottom Layer "PolygonDirect" (solid, shelved, pour order 73): 37.1,54.8 38.4,54.8 38.4,62.2 36.8,62.2 35.9,61.3 35.9,56
OUT_1N_STP2 on Bottom Layer "PolygonDirect" (solid, shelved, pour order 72): 24.2,54.8 25.5,54.8 25.5,62.2 23.9,62.2 23,61.3 23,56
OUT_1N_STP1 on Bottom Layer "PolygonDirect" (solid, shelved, pour order 71): 11.3,54.8 12.6,54.8 12.6,62.2 11,62.2 10.1,61.3 10.1,56
GND on Top Layer "NONET_L-01_P-001" (solid, shelved, pour order 133): 0,65 0,0 95,0 95,65
5V0_LOGIC on Top Layer "PolygonDirect" (solid, shelved, pour order 106): 27,9.7 29.4,9.7 29.4,10.3 30.6,11.5 32,11.5 32,7.7 30.4,7.7 30.4,9.2 27,9.2
24V_MAIN on Top Layer "PolygonDirect" (solid, shelved, pour order 117): 25.5,11.6 27.7,11.6 27.7,15.8 25.6,15.8 25.6,14.9 24.6,13.9 24.6,13.5 24.6,12.5
IP_SOURCE on Top Layer "PolygonDirect" (solid, shelved, pour order 116): 20.75,19.45 20.75,15.7 24.2,15.7 24.2,20.5 23.8,20.9 22.2,20.9
5V0_BUCK on Top Layer "PolygonDirect" (solid, shelved, pour order 131): 24.4,15.7 27.4,15.7 27.4,20.5 24.4,20.5
24V_MAIN on Top Layer "PolygonDirect" (solid, shelved, pour order 132): 14.6,4.9 14.6,11 16.1,12.5 20.8,12.5 20.8,12.3 20.8,7.5 18.2,4.9
BUCK_5V_SW on Top Layer "PolygonDirect" (solid, shelved, pour order 128): 30.1,14.9 27.5,14.9 27.5,20.5 30.1,20.5 30.1,17.5
24V_MAIN on Top Layer "PolygonDirect" (solid, shelved, pour order 115): 8.1,39.7 8.1,41.9 10.6,41.9 10.6,39.7
24V_MAIN on Top Layer "PolygonDirect" (solid, shelved, pour order 114): 33.9,39.7 33.9,41.9 36.4,41.9 36.4,39.7
24V_MAIN on Top Layer "PolygonDirect" (solid, shelved, pour order 113): 21,54.4 21,56.6 23.5,56.6 23.5,54.4
24V_MAIN on Top Layer "PolygonDirect" (solid, shelved, pour order 112): 21,39.7 21,41.9 23.5,41.9 23.5,39.7
24V_MAIN on Top Layer "PolygonDirect" (solid, shelved, pour order 111): 33.9,54.4 33.9,56.6 36.4,56.6 36.4,54.4
24V_MAIN on Top Layer "PolygonDirect" (solid, shelved, pour order 110): 46.8,39.7 46.8,41.9 49.3,41.9 49.3,39.7
24V_MAIN on Top Layer "PolygonDirect" (solid, shelved, pour order 109): 46.8,54.4 46.8,56.6 49.3,56.6 49.3,54.4
24V_MAIN on Top Layer "PolygonDirect" (solid, shelved, pour order 108): 8.1,54.4 8.1,56.6 10.6,56.6 10.6,54.4
24V_IN on Top Layer "PolygonDirect" (solid, shelved, pour order 107): 2.8,26.2 2.8,16.8 3.9,15.7 15.5,15.7 21,15.7 21,20.9 15.7,26.2
24V_MAIN on L3 - PWR "NONET_L-01_P-001" (solid, shelved, pour order 130): 0,65 0,0 95,0 95,65
GND on L5 - GND "NONET_L-01_P-001" (solid, shelved, pour order 127): 0,65 0,0 95,0 95,65
GND on L2 - GND "NONET_L-01_P-001" (solid, shelved, pour order 135): 0,65 0,0 95,0 95,65

## Other copper
Top Layer:
  region net 24V_IN: 20.505,16.1 15.855,16.1 15.855,16.825 16.405,16.825 16.405,17.45 15.831,17.45 15.831,18.09 16.405,18.09 16.405,18.71 15.831,18.71 15.831,19.35 16.405,19.35 16.405,19.975 15.843,19.975 15.843,20.7 20.505,20.7
Bottom Layer:
  region net IP_VOUT_R: 20.505,20.7 15.855,20.7 15.855,19.975 16.405,19.975 16.405,19.35 15.831,19.35 15.831,18.71 16.405,18.71 16.405,18.09 15.831,18.09 15.831,17.45 16.405,17.45 16.405,16.825 15.843,16.825 15.843,16.1 20.505,16.1

## Silkscreen, mask and mechanical layers (free items; w line width, h text height)
Top Solder:
  drawing of 96 lines, arcs and shapes, not listed
Board Shape:
  the board outline again, w0.2
Notes (Mech3):
  lines w0.254: 0,0 0,5 5,5 5,0 0,0 ; 0,60 5,60 5,65 0,65 0,60 ; 90,0 95,0 95,5 90,5 90,0 ; 90,60 90,65 95,65 95,60 90,60

## Dimensions
0,65 to 95,65 on Notes (Mech3)
0,65 to 0,0 on Notes (Mech3)